# EAGLE board CC2530EV (EAGLE 7.1.0)
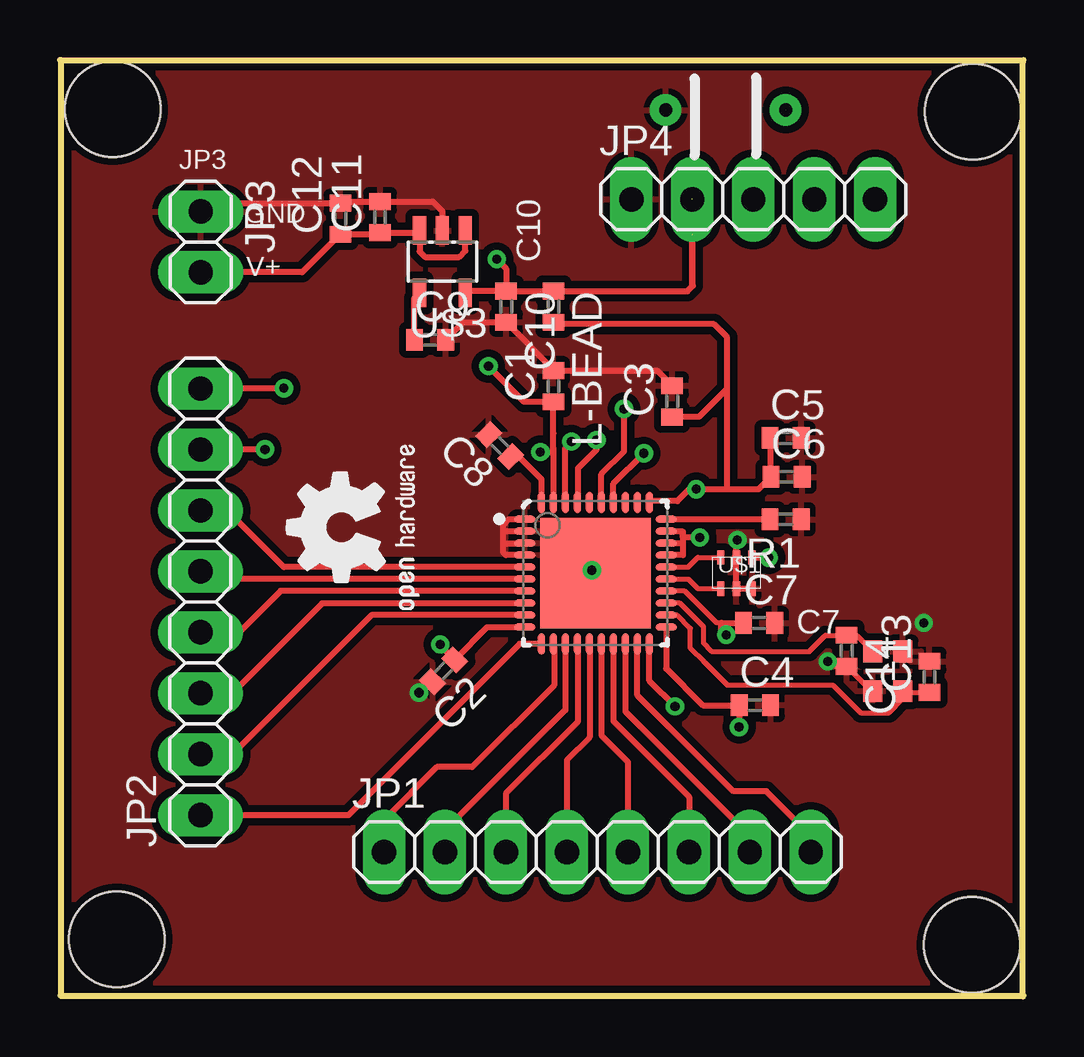
[diagram p0: board, top side]
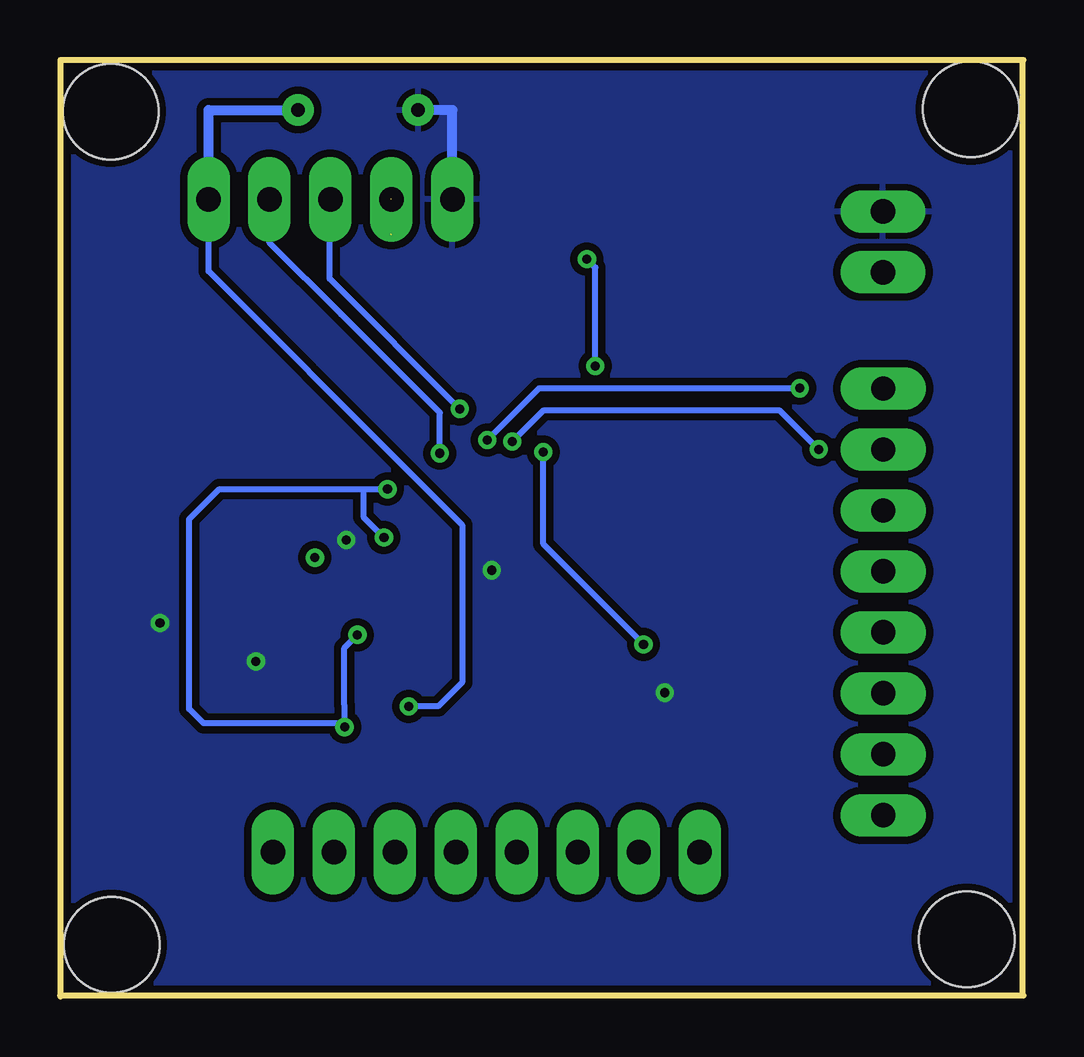
[diagram p1: board, bottom side, seen from below]

Size 40.15 x 39.04 mm. Coordinates in mm from the lower left corner, seen from the top.
Outline: 0,39.04 40.14,39.04
Outline: 40.12,0 40.12,38.97
Outline: 0.05,0.07 0.05,39.03
Outline: 0.02,0.04 40.15,0.04
Copper layers (1*16): Top 0.035mm / dielectric 1.5mm / Bottom 0.035mm
Design rules "default_dru *": minimum track width 4mil, minimum drill 6mil, track to track 6mil, track to pad 6mil, pad to pad 6mil, via to via 6mil, smd to smd 0mil, copper to edge 0.25mm, drill to drill 0.25mm, minimum pad ring 15mil, minimum via ring 7.5mil, stop-mask expansion 0mil, vias tented up to drill 10mil, thermal gap 10mil
Holes 3.99 mm at 2.2,36.99 38.04,36.89 38,2.15 2.37,2.39

## Footprints (pad centres in the part's own frame; a part is rotated, then mirrored left to right if it is on the bottom)
C0402 = smd 0.7 x 0.9: 1 -0.65,0; 2 0.65,0
1X08 = drill 1.016 long: 1 -8.89,0; 2 -6.35,0; 3 -3.81,0; 4 -1.27,0; 5 1.27,0; 6 3.81,0; 7 6.35,0; 8 8.89,0
1X02 = drill 1.016 long: 1 -1.27,0; 2 1.27,0
1X05 = drill 1.016 long: 1 -5.08,0; 2 -2.54,0; 3 0,0; 4 2.54,0; 5 5.08,0
L-BEAD = smd 0.7 x 0.9: 1 -0.65,0; 2 0.65,0
R0402 = smd 0.7 x 0.9: 1 -0.65,0; 2 0.65,0
QFN50P600X600X100-41N = smd 0.9 x 0.3: 1 -2.95,2.25; 2 -2.95,1.75; 3 -2.95,1.25; 4 -2.95,0.75; 5 -2.95,0.25; 6 -2.95,-0.25; 7 -2.95,-0.75; 8 -2.95,-1.25; 9 -2.95,-1.75; 10 -2.95,-2.25; 21 2.95,-2.25; 22 2.95,-1.75; 23 2.95,-1.25; 24 2.95,-0.75; 25 2.95,-0.25; 26 2.95,0.25; 27 2.95,0.75; 28 2.95,1.25; 29 2.95,1.75; 30 2.95,2.25 | smd 0.3 x 0.9: 11 -2.25,-2.95; 12 -1.75,-2.95; 13 -1.25,-2.95; 14 -0.75,-2.95; 15 -0.25,-2.95; 16 0.25,-2.95; 17 0.75,-2.95; 18 1.25,-2.95; 19 1.75,-2.95; 20 2.25,-2.95; 31 2.25,2.95; 32 1.75,2.95; 33 1.25,2.95; 34 0.75,2.95; 35 0.25,2.95; 36 -0.25,2.95; 37 -0.75,2.95; 38 -1.25,2.95; 39 -1.75,2.95; 40 -2.25,2.95 | smd 4.6 x 4.6: 41 0,0
24530BM15A0002 = smd 0.6 x 0.3: P$1 -0.65,0.65; P$2 -0.65,0; P$3 -0.65,-0.65; P$4 0.65,-0.65; P$5 0.65,0; P$6 0.65,0.65
SOT23 = smd 0.55 x 1.2: 1 -0.95,-1.3; 2 0,-1.3; 3 0.95,-1.3; 4 0.95,1.3; 5 -0.95,1.3
2.5X2X0.5 = smd 0.9 x 0.8: P$1 -0.825,-0.625; P$2 0.825,-0.625; P$3 0.825,0.625; P$4 -0.825,0.625
EVQ_11_TH = drill 0.55 pad 1.016: P$1 -2.5,0; P$2 2.5,0

## Placement (x,y rotation side)
C1  100n  [C0402]  20.56,25.44 90 top
C2  100n  [C0402]  15.98,13.58 225 top
C3  100n  [C0402]  25.51,24.81 90 top
C4  100n  [C0402]  28.95,12.15 0 top
C5  100n  [C0402]  30.23,23.29 0 top
C6  100n  [C0402]  30.27,21.67 0 top
C7  100n  [C0402]  29.13,15.58 0 top
C8  1u  [C0402]  18.32,22.97 135 top
C9  100n  [C0402]  15.42,27.38 0 top
C10  2u2  [C0402]  18.59,28.76 270 top
C11  100n  [C0402]  13.33,32.49 90 top
C12  2u2  [C0402]  11.68,32.43 90 top
C13  27p  [C0402]  36.23,13.33 90 top
C14  27p  [C0402]  32.78,14.41 270 top
GOLD_ORB_SM1  OSHWLOGO_GOLD_ORB_SM  [OSHW2]  15.12,15.97 90 top
JP1  [1X08]  22.39,6.02 0 top
JP2  [1X08]  5.85,16.45 90 top
JP3  [1X02]  5.86,31.46 270 top
JP4  [1X05]  28.89,33.23 0 top
L-BEAD  [L-BEAD]  20.56,28.76 270 top
R1  56K  [R0402]  30.24,19.9 180 top
U$1  CC2530  [QFN50P600X600X100-41N]  22.31,17.65 0 top
U$2  24530BM15A0002  [24530BM15A0002]  28.19,17.66 270 top
U$3  TPS732XX  [SOT23]  15.93,30.64 180 top
U$4  XTAL32M  [2.5X2X0.5]  34.49,13.56 270 top
U$5  PUSH_BOT  [EVQ_11_TH]  27.74,36.96 180 top

## Library data of the parts
C1-C14 R1 = resistor
GOLD_ORB_SM1 = bfl
JP1-JP4 = pinhead
L-BEAD = L-Bead
U$1 = chipcon-ti-v2
U$2 = 24530BM15A0002
U$3 = TPS732xx
U$4 = abm_osc
U$5 = push_botton

## Nets
DBG_DC: JP4.4 U$1.34
DBG_DD: JP4.3 U$1.35
GND: C1.2 C2.2 C3.2 C4.2 C5.2 C6.2 C7.2 C8.2 C9.2 C10.2 C11.2 C12.2 C13.2 C14.2 JP3.1 JP4.1 R1.1 U$1.1 U$1.2 U$1.3 U$1.4 U$1.41 U$2.P$2 U$2.P$5 U$2.P$6 U$3.2 U$4.P$2 U$4.P$4 U$5.P$2
N$1: C8.1 U$1.40
N$2: R1.2 U$1.30
N$3: U$1.25 U$2.P$4
N$4: U$1.26 U$2.P$3
N$6: C9.1 U$3.4
N$7: C14.1 U$1.23 U$4.P$1
N$8: C13.1 U$1.22 U$4.P$3
N$9: JP1.1 U$1.12
N$10: JP1.2 U$1.13
N$11: JP1.3 U$1.14
N$12: JP1.4 U$1.15
N$13: JP1.5 U$1.16
N$14: JP1.6 U$1.17
N$15: JP1.7 U$1.18
N$16: JP1.8 U$1.19
N$17: JP2.1 U$1.11
N$18: JP2.2 U$1.9
N$19: JP2.3 U$1.8
N$20: JP2.4 U$1.7
N$21: JP2.5 U$1.6
N$22: JP2.6 U$1.5
N$23: JP2.7 U$1.38
N$24: JP2.8 U$1.37
RESET: JP4.5 U$1.20 U$5.P$1
TX: U$2.P$1
V+: C11.1 C12.1 JP3.2 U$3.1 U$3.3
VCC: C3.1 C4.1 C5.1 C6.1 C7.1 L-BEAD.2 U$1.21 U$1.24 U$1.27 U$1.28 U$1.29 U$1.31
VDD: C1.1 C2.1 C10.1 JP4.2 L-BEAD.1 U$1.10 U$1.39 U$3.5

## Tracks (layer width: path | path; a pad name or v marks a point on that pad's centre or on a via)
DBG_DC  (via drill 0.38)
  Top 0.254: v24.33,22.65 23.06,21.38 U$1.34
  Bottom 0.254: v24.33,22.65 24.33,24.34 28.44,28.45 31.43,31.44 JP4.4
DBG_DD  (via drill 0.38)
  Top 0.254: U$1.35 22.56,21.78 23.5,22.72 v23.5,24.5
  Bottom 0.254: v23.5,24.5 28.92,29.92 | 28.92,29.92 JP4.3 28.92,29.92
GND  (via drill 0.38)
  Top 0.203: v31.99,13.97 32.2,13.77 C14.2 33.8,12.74 U$4.P$2
  Top 0.254: U$3.2 15.93,32.73 15.53,33.14 11.74,33.14 C12.2 4.51,33.08 JP3.1 | C9.2 16.8,28.11 C10.2 20.56,26.14 C1.2 24.88,26.09 C3.2 | C2.2 15.08,12.67 v14.96,12.67 | U$1.41 22.17,17.79 v22.16,17.78 | U$1.4 18.58,18.41 18.47,18.52 18.47,18.84 18.52,18.89 | 18.52,18.89 U$1.3 | 18.52,18.89 18.47,18.89 18.47,19.44 | 18.47,19.44 18.47,19.67 18.71,19.91 U$1.1 | U$1.2 18.5,19.41 18.47,19.44 | v28.22,19.03 28.19,19 U$2.P$2 U$2.P$5 U$2.P$6
  Bottom 0.406: U$5.P$2 23.81,36.96 JP4.1
  other vias: 35.99,15.58
  pour Top (isolate 0.305): 0.42,30.35 0.37,0.25 39.77,0.38 39.88,38.63 0.37,38.71 0.34,33.58
  pour Bottom (isolate 0.305): 0.39,38.77 39.92,38.8 39.93,0.35 0.32,0.27 0.43,36.1
N$1
  Top 0.254: U$1.40 20.05,21.08 20.05,21.57 20,21.63 19.12,22.51 C8.1
N$2
  Top 0.254: R1.2 U$1.30
N$3
  Top 0.2: U$1.25 26.18,17.41 26.58,17.01 | 26.58,17.01 | 26.58,17.01 U$2.P$4
N$4
  Top 0.2: U$1.26 26.18,17.91 26.58,18.3 26.58,18.31 U$2.P$3
N$6
  Top 0.254: U$3.4 14.77,29.12 C9.1
N$7
  Top 0.203: U$1.23 25.82,16.41 26.81,15.41 26.81,14.74 27.17,14.39 29.02,14.39 31.22,14.39 31.9,15.06 C14.1 33.19,15.07 U$4.P$1
N$8
  Top 0.203: U$1.22 25.71,15.91 26.26,15.35 26.26,14.52 26.83,13.95 27.8,12.99 32.2,12.99 33.35,11.83 34.54,11.83 35.12,12.4 U$4.P$3 35.18,12.68 C13.1
N$9
  Top 0.254: JP1.1 13.5,7.37 15.7,9.57 17.17,9.57 20.59,12.98 20.59,14.68 U$1.12
N$10
  Top 0.254: U$1.13 | JP1.2 16.04,6.94 21.06,11.95 U$1.13
N$11
  Top 0.254: U$1.14 21.56,11.45 18.58,8.46 JP1.3
N$12
  Top 0.254: U$1.15 22.07,10.81 21.12,9.87 JP1.4
N$13
  Top 0.254: U$1.16 22.56,10.89 23.67,9.78 JP1.5
N$14
  Top 0.254: U$1.17 23.06,11.48 26.21,8.33 JP1.6
N$15
  Top 0.254: U$1.18 23.56,11.88 26.92,8.52 28.74,6.7 JP1.7
N$16
  Top 0.254: JP1.8 31.28,6.7 29.43,8.56 28.05,8.56 24.06,12.55 U$1.19
N$17
  Top 0.254: JP2.1 12.02,7.56 16.66,12.21 19.16,14.71 U$1.11
N$18
  Top 0.254: JP2.2 7.18,10.1 9.83,12.75 12.98,15.91 U$1.9
N$19
  Top 0.254: JP2.3 7.18,12.64 10.93,16.39 19.35,16.39 U$1.8
N$20
  Top 0.254: JP2.4 7.46,15.18 9.19,16.92 19.35,16.92 U$1.7
N$21
  Top 0.254: JP2.5 6.17,17.41 U$1.6
N$22
  Top 0.254: U$1.5 9.32,17.91 6.95,20.28 5.87,20.28 JP2.6
N$23  (via drill 0.38)
  Top 0.254: JP2.7 v8.54,22.81 | v21.31,23.14 21.06,22.88 U$1.38
  Bottom 0.254: v8.54,22.81 10.18,24.45 18.57,24.45 20,24.45 v21.31,23.14
N$24  (via drill 0.38)
  Top 0.254: U$1.37 21.59,20.64 21.59,22.03 22.35,22.79 v22.35,23.2 | v9.33,25.36 9.31,25.34 JP2.8
  Bottom 0.254: v22.35,23.2 20.19,25.36 v9.33,25.36
RESET  (via drill 0.38)
  Top 0.254: v25.63,12.1 24.56,13.16 U$1.20
  Bottom 0.25: v25.63,12.1 24.39,12.1 23.4,13.09 23.4,19.67 25.63,21.89
  Bottom 0.254: 25.63,21.89 33.97,30.23 33.97,32.74 JP4.5
  Bottom 0.406: U$5.P$1 33.97,36.96 33.97,32.74
TX  (via drill 0.38)
  Top 0.25: U$2.P$1 v29.53,18.31 v29.53,18.3
V+
  Top 0.254: JP3.2 10.09,30.19 C12.1 13.27,31.78 C11.1 14.89,31.84 U$3.3 14.98,31.06 15.21,30.83 16.63,30.83 16.89,31.09 U$3.1
VCC  (via drill 0.38)
  Top 0.2: U$1.24 26.03,16.91 27.07,15.86 27.36,15.58 27.55,15.58
  Top 0.254: C5.1 29.62,23.25 C6.1 29.11,21.15 27.57,21.15 | U$1.21 25.26,13.68 26.79,12.15 C4.1 | L-BEAD.2 20.64,28.03 27.26,28.03 27.8,27.49 27.8,25.35 | 27.8,25.35 26.61,24.16 C3.1 | C4.1 28.3,11.25 | C7.1 27.55,15.58 27.55,15.29 v27.76,15.08 | v28.29,11.24 28.29,12.14 C4.1 | U$1.29 25.27,19.4 25.92,19.4 25.95,19.37 | 25.95,19.37 25.95,18.91 25.94,18.9 25.27,18.9 U$1.28 | 25.95,19.37 25.95,18.4 U$1.27 | 25.95,19.37 25.95,19.14 v26.66,19.14 | 27.57,21.15 v26.51,21.15 26.23,21.15 25.73,20.66 24.61,20.66 U$1.31 | 27.8,25.35 27.8,21.15 27.57,21.15
  Bottom 0.254: 27.52,21.15 31.65,21.15 32.93,21.15 33.52,21.15 34.77,19.9 34.77,11.99 34.17,11.39 31.6,11.39 28.45,11.39 v28.29,11.24 28.29,12.14 C4.1 28.3,14.54 v27.76,15.08 | 27.52,21.15 v26.51,21.15 | v26.66,19.14 27.52,20 27.52,21.15
VDD  (via drill 0.38)  (2 unrouted)
  Top 0.254: U$1.10 17.81,15.41 C2.1 15.84,14.64 v15.84,14.68 | U$3.5 16.95,29.41 C10.1 | C10.1 L-BEAD.1 26.14,29.41 26.37,29.64 26.37,31.75 JP4.2 | v17.85,26.28 19.34,24.79 C1.1 20.56,23.49 20.56,22.87 | v18.2,30.74 18.59,30.35 C10.1 | 26.37,31.79 26.35,33.27 | 26.34,29.64 26.34,31.75 | 20.56,22.87 U$1.39 | v20.02,22.7 20.56,22.7 20.56,22.87
  Bottom 0.254: v15.84,14.68 19.89,18.74 20.02,18.86 v20.02,22.7 | v17.85,26.28 17.85,30.39 v18.2,30.74

## Text on the board
tNames: JP3 | GND | C10 | V+ | C7
Document: RESET_BTN | JP3 | C12 | C11 | U3 | JP4 | GND | V+ | C10 | GND | VDD | RST | L | C9 | DBG-DD | DBG-DC | C3 | P1_7 | C1 | CC-BY-SA 3.0 | C5 | P1_6 | C8 | C6 | P1_5 | R1 | P1_4 | U2 | C14 | U4 | P1_3 | C2 | C7 | C13 | P1_2 | C4 | P1_1 | P1_0 | JP2 | JP1 | CC2530EV STORM LAB | P0_7 | P0_6 | P0_5 | P0_4 | P0_3 | P0_2 | P0_1 | P0_0